# EAGLE board strobe_print (EAGLE 6.3), part 1 of 2
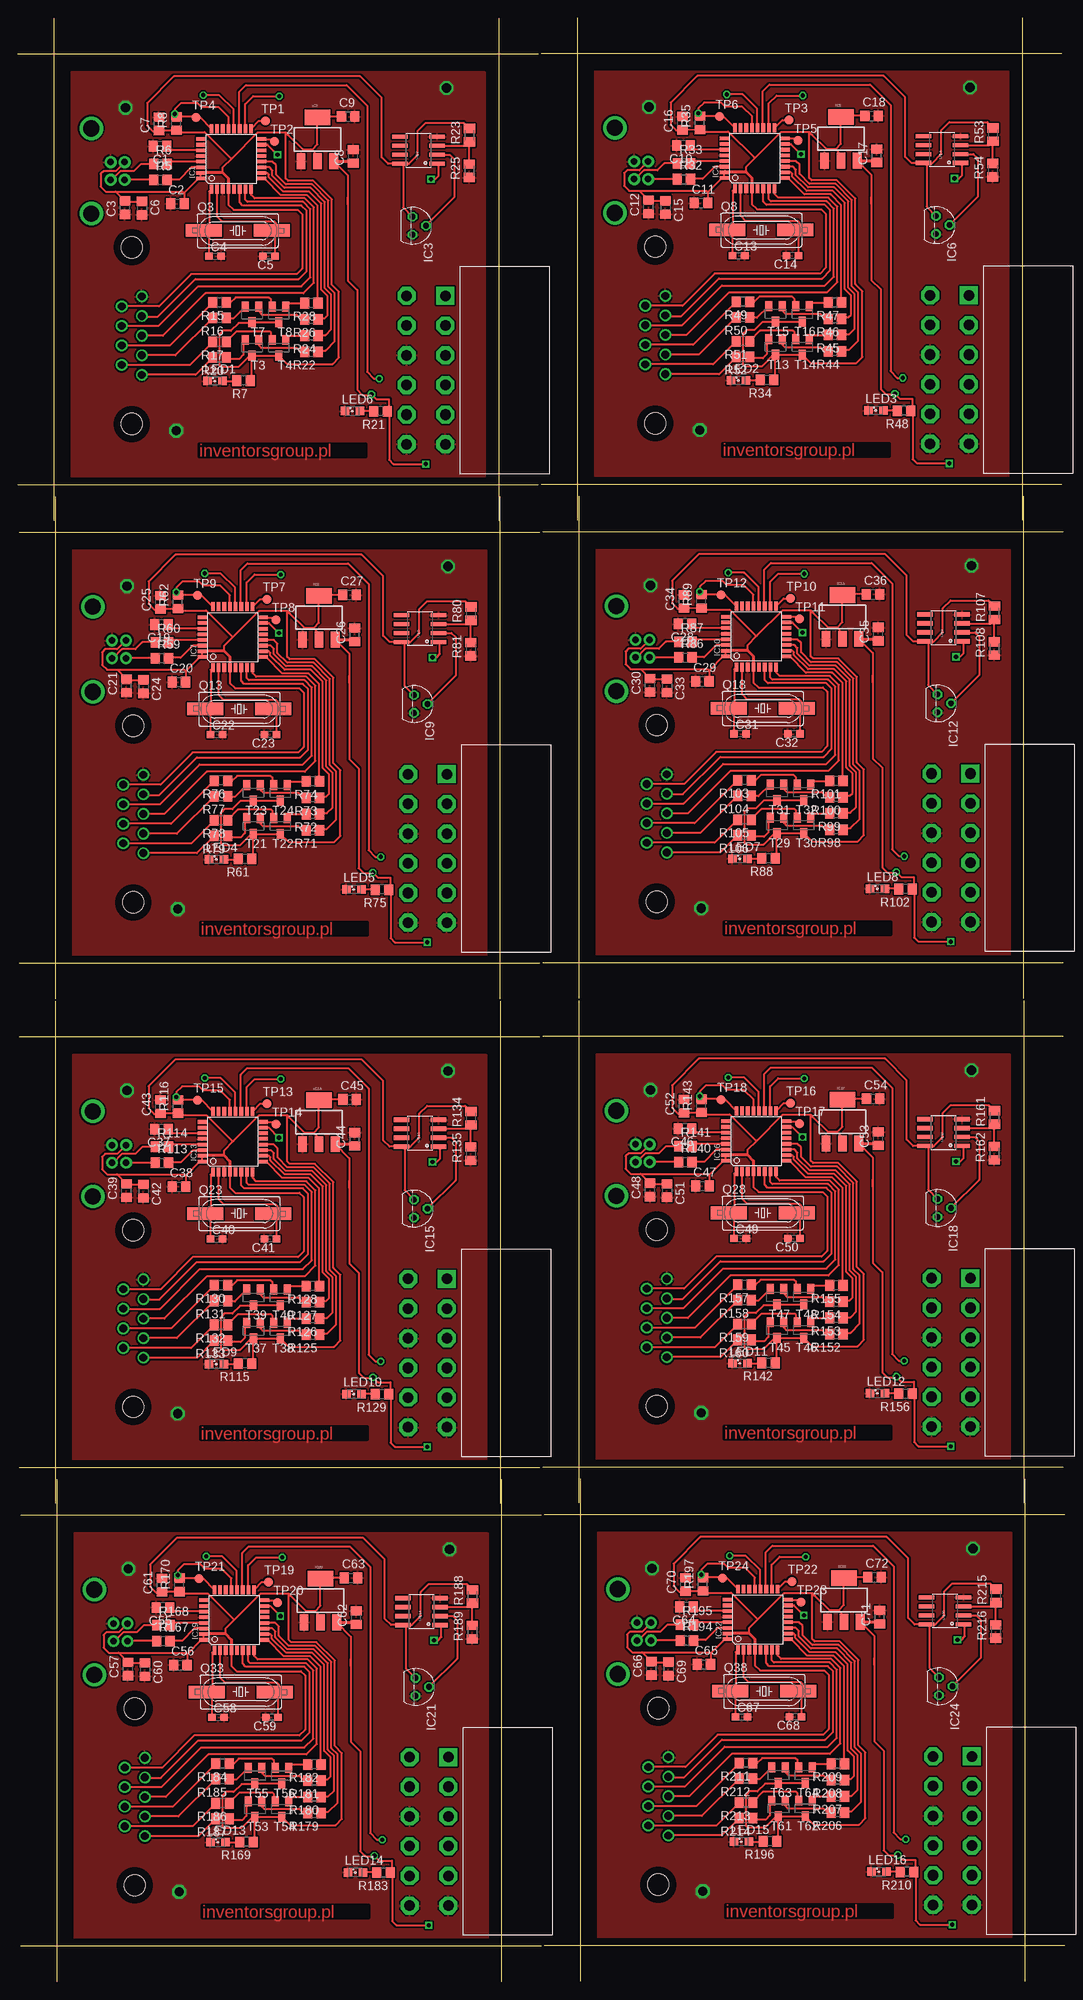
[diagram p0: board, top side]
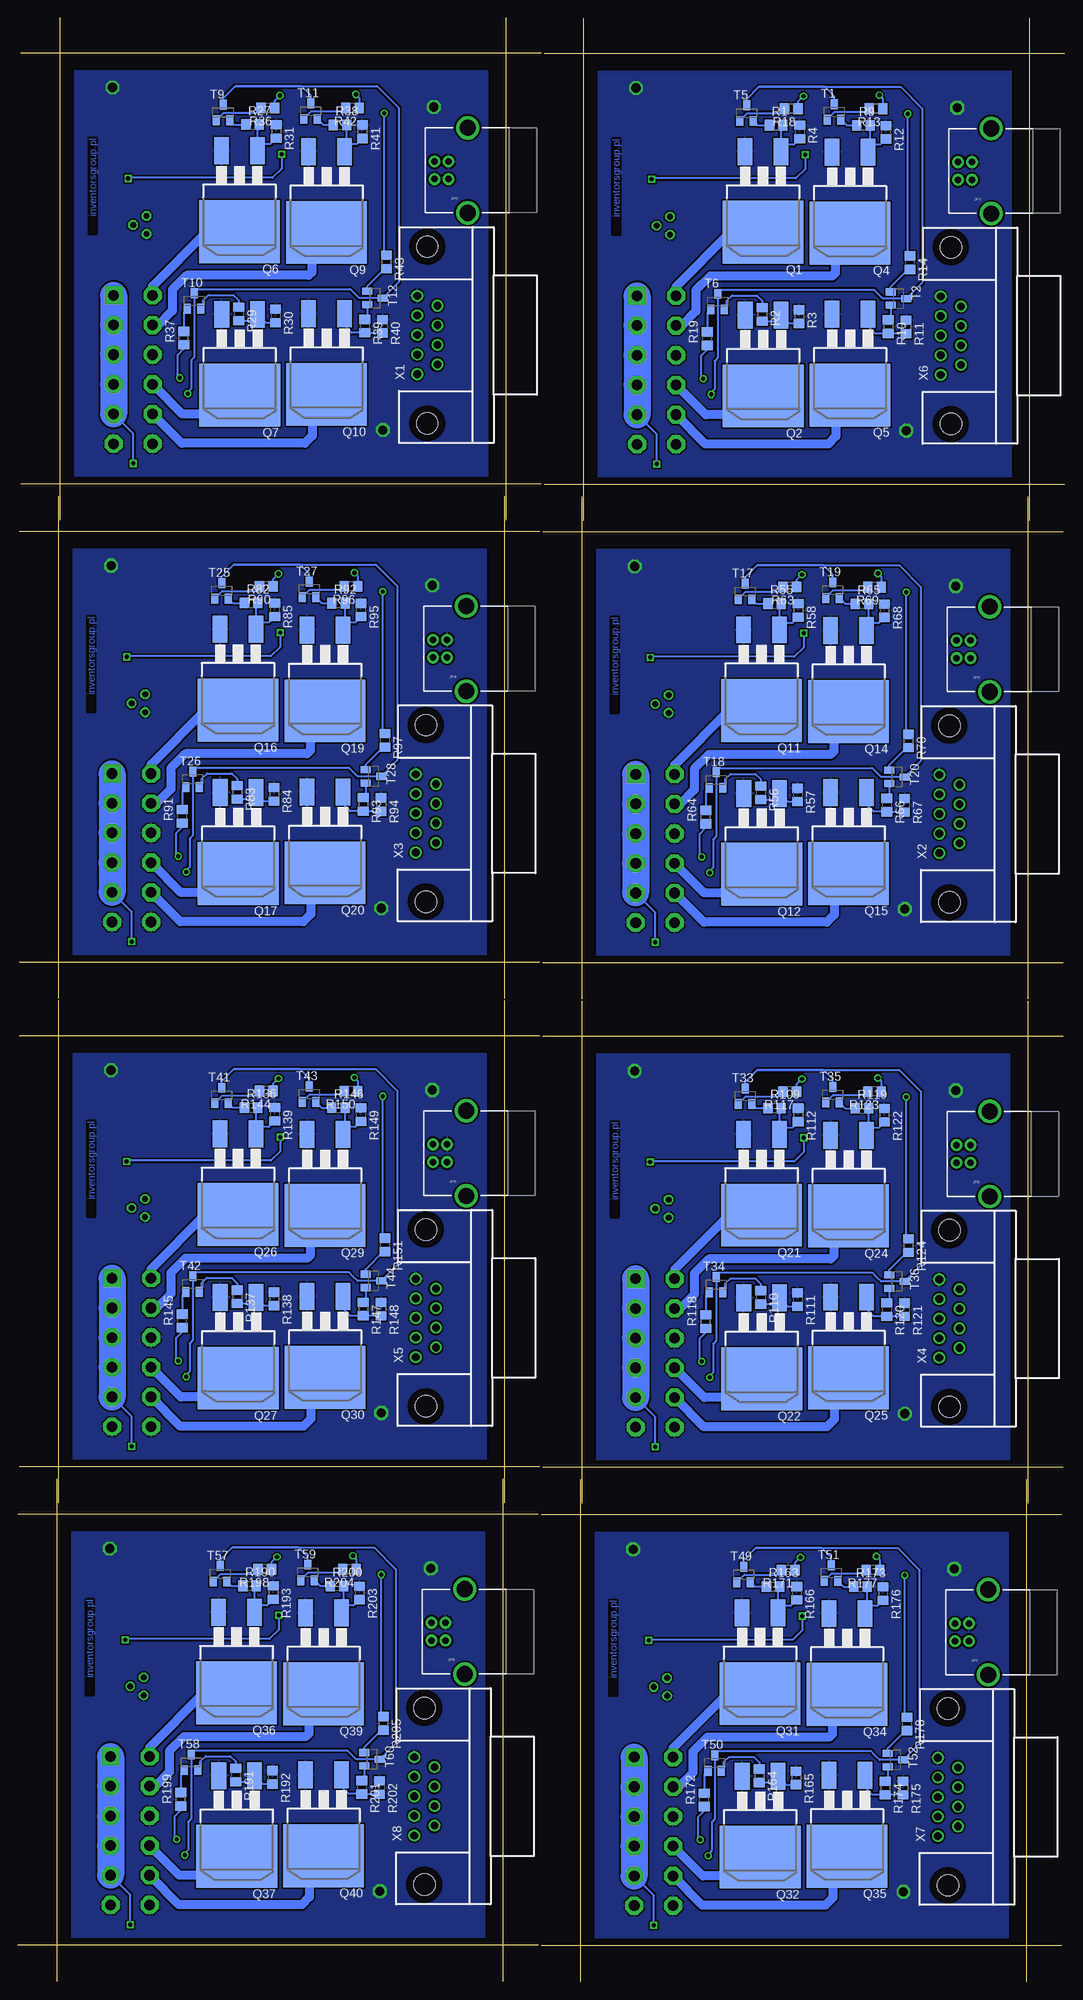
[diagram p1: board, bottom side, seen from below]

Size 148.13 x 277.88 mm. Coordinates in mm from the lower left corner, seen from the top.
Outline: 68.08,206.73 68.08,277.79
Outline: 5.08,277.79 5.08,206.73
Outline: 0,211.81 73.66,211.81
Outline: 0,272.77 73.66,272.77
Outline: 142.13,206.82 142.13,277.88
Outline: 79.13,277.88 79.13,206.82
Outline: 74.05,211.9 147.71,211.9
Outline: 74.05,272.86 147.71,272.86
Outline: 68.29,139.06 68.29,210.12
Outline: 5.29,210.12 5.29,139.06
Outline: 0.21,144.14 73.87,144.14
Outline: 0.21,205.1 73.87,205.1
Outline: 142.34,139.15 142.34,210.21
Outline: 79.34,210.21 79.34,139.15
Outline: 74.26,144.23 147.92,144.23
Outline: 74.26,205.19 147.92,205.19
Outline: 68.29,67.67 68.29,138.73
Outline: 5.29,138.73 5.29,67.67
Outline: 0.21,72.75 73.87,72.75
Outline: 0.21,133.71 73.87,133.71
Outline: 142.34,67.76 142.34,138.82
Outline: 79.34,138.82 79.34,67.76
Outline: 74.26,72.84 147.92,72.84
Outline: 74.26,133.8 147.92,133.8
Outline: 68.5,0 68.5,71.06
Outline: 5.5,71.06 5.5,0
Outline: 0.42,5.08 74.08,5.08
Outline: 0.42,66.04 74.08,66.04
Outline: 142.55,0.09 142.55,71.15
Outline: 79.55,71.15 79.55,0.09
Outline: 74.47,5.17 148.13,5.17
Outline: 74.47,66.13 148.13,66.13
Copper layers (1*16): Top 0.035mm / dielectric 1.5mm / Bottom 0.035mm
Design rules "default": minimum track width 10mil, minimum drill 24mil, track to track 8mil, track to pad 8mil, pad to pad 8mil, via to via 8mil, smd to smd 8mil, copper to edge 40mil, drill to drill 8mil, minimum pad ring 10mil, minimum via ring 8mil, stop-mask expansion 4mil, vias tented up to drill 0mil, thermal gap 10mil

## Footprints (pad centres in the part's own frame; a part is rotated, then mirrored left to right if it is on the bottom)
C0805 = smd 1.3 x 1.5: 1 -0.95,0; 2 0.95,0
C0603 = smd 1.1 x 1: 1 -0.85,0; 2 0.85,0
TQFP32-08 = smd 1.27 x 0.508: 1 -4.293,2.8; 2 -4.293,2; 3 -4.293,1.2; 4 -4.293,0.4; 5 -4.293,-0.4; 6 -4.293,-1.2; 7 -4.293,-2; 8 -4.293,-2.8; 17 4.293,-2.8; 18 4.293,-2; 19 4.293,-1.2; 20 4.293,-0.4; 21 4.293,0.4; 22 4.293,1.2; 23 4.293,2; 24 4.293,2.8 | smd 0.508 x 1.27: 9 -2.8,-4.293; 10 -2,-4.293; 11 -1.2,-4.293; 12 -0.4,-4.293; 13 0.4,-4.293; 14 1.2,-4.293; 15 2,-4.293; 16 2.8,-4.293; 25 2.8,4.293; 26 2,4.293; 27 1.2,4.293; 28 0.4,4.293; 29 -0.4,4.293; 30 -1.2,4.293; 31 -2,4.293; 32 -2.8,4.293
SOT223 = smd 1.219 x 2.235: 1 -2.311,-3.099; 2 0,-3.099; 3 2.311,-3.099 | smd 3.6 x 2.2: 4 0,3.099
TO92 = drill 0.813 octagon: 1 -1.27,0; 2 0,1.905; 3 1.27,0
USB-B-PTH = drill 0.914 pad 1.676: D+ 0,1.25; D- 1.981,1.25; GND 0,-1.25; VBUS 1.981,-1.25 | drill 2.286: S1 -2.718,-6.02; S2 -2.718,6.02
SML0805 = smd 1.2 x 1.2: A 1.05,0; C -1.05,0
D2PACK = smd 2.083 x 3.81: 1 -2.54,-8.89; 3 2.54,-8.89 | smd 11.43 x 8.89: 2 0,2.54
SM49 = smd 5.08 x 1.778: 1 -4.826,0; 2 4.826,0
R0805 = smd 1.3 x 1.5: 1 -0.95,0; 2 0.95,0
M0805 = smd 1.3 x 1.6: 1 -0.95,0; 2 0.95,0
SOT23 = smd 1 x 1.4: 1 -0.95,-1.1; 2 0.95,-1.1; 3 0,1.1
B1,27 = smd 1.27 x 1.27: TP 0,0
MF42-10 = drill 1.5 pad 2.54 square: 1 16.8,0 | drill 1.5 pad 2.54 octagon: 2 12.6,0; 3 8.4,0; 4 4.2,0; 5 0,0; 6 16.8,5.5; 7 12.6,5.5; 8 8.4,5.5; 9 4.2,5.5; 10 0,5.5; 11 -4.2,5.5; 12 -4.2,0
SO08 = smd 0.61 x 2.21: 1 -1.905,-2.616; 2 -0.635,-2.616; 3 0.635,-2.616; 4 1.905,-2.616; 5 1.905,2.616; 6 0.635,2.616; 7 -0.635,2.616; 8 -1.905,2.616
H3M09RA = drill 1.092: 1 -5.537,1.422; 2 -2.769,1.422; 3 0,1.422; 4 2.769,1.422; 5 5.537,1.422; 6 -4.153,-1.422; 7 -1.384,-1.422; 8 1.384,-1.422; 9 4.153,-1.422 | hole 3.048: -12.497,0; 12.497,0

## Placement (x,y rotation side)
C1  1uF  [C0805]  20.12,259.69 180 top
C2  100N  [C0805]  22.59,251.56 0 top
C3  100N  [C0805]  15.18,251 90 top
C4  22Pf  [C0603]  27.92,244.14 0 top
C5  22Pf  [C0603]  35.54,244.14 180 top
C6  100N  [C0805]  17.58,250.92 270 top
C7  100N  [C0805]  19.96,262.86 90 top
C8  100N  [C0805]  47.46,258.25 90 top
C9  100N  [C0805]  46.74,263.89 0 top
C10  1uF  [C0805]  94.17,259.78 180 top
C11  100N  [C0805]  96.64,251.65 0 top
C12  100N  [C0805]  89.23,251.09 90 top
C13  22Pf  [C0603]  101.97,244.23 0 top
C14  22Pf  [C0603]  109.59,244.23 180 top
C15  100N  [C0805]  91.62,251.01 270 top
C16  100N  [C0805]  94.01,262.95 90 top
C17  100N  [C0805]  121.51,258.34 90 top
C18  100N  [C0805]  120.79,263.98 0 top
C19  1uF  [C0805]  20.33,192.02 180 top
C20  100N  [C0805]  22.8,183.89 0 top
C21  100N  [C0805]  15.39,183.33 90 top
C22  22Pf  [C0603]  28.13,176.47 0 top
C23  22Pf  [C0603]  35.75,176.47 180 top
C24  100N  [C0805]  17.78,183.25 270 top
C25  100N  [C0805]  20.17,195.19 90 top
C26  100N  [C0805]  47.67,190.58 90 top
C27  100N  [C0805]  46.95,196.22 0 top
C28  1uF  [C0805]  94.38,192.11 180 top
C29  100N  [C0805]  96.85,183.98 0 top
C30  100N  [C0805]  89.44,183.42 90 top
C31  22Pf  [C0603]  102.18,176.56 0 top
C32  22Pf  [C0603]  109.8,176.56 180 top
C33  100N  [C0805]  91.83,183.34 270 top
C34  100N  [C0805]  94.22,195.28 90 top
C35  100N  [C0805]  121.72,190.67 90 top
C36  100N  [C0805]  121,196.31 0 top
C37  1uF  [C0805]  20.33,120.63 180 top
C38  100N  [C0805]  22.8,112.5 0 top
C39  100N  [C0805]  15.39,111.94 90 top
C40  22Pf  [C0603]  28.14,105.08 0 top
C41  22Pf  [C0603]  35.76,105.08 180 top
C42  100N  [C0805]  17.79,111.86 270 top
C43  100N  [C0805]  20.18,123.8 90 top
C44  100N  [C0805]  47.68,119.19 90 top
C45  100N  [C0805]  46.95,124.83 0 top
C46  1uF  [C0805]  94.38,120.72 180 top
C47  100N  [C0805]  96.85,112.59 0 top
C48  100N  [C0805]  89.44,112.03 90 top
C49  22Pf  [C0603]  102.18,105.17 0 top
C50  22Pf  [C0603]  109.8,105.17 180 top
C51  100N  [C0805]  91.83,111.95 270 top
C52  100N  [C0805]  94.22,123.89 90 top
C53  100N  [C0805]  121.72,119.28 90 top
C54  100N  [C0805]  121,124.92 0 top
C55  1uF  [C0805]  20.54,52.96 180 top
C56  100N  [C0805]  23.01,44.83 0 top
C57  100N  [C0805]  15.6,44.27 90 top
C58  22Pf  [C0603]  28.35,37.41 0 top
C59  22Pf  [C0603]  35.97,37.41 180 top
C60  100N  [C0805]  18,44.19 270 top
C61  100N  [C0805]  20.39,56.13 90 top
C62  100N  [C0805]  47.89,51.52 90 top
C63  100N  [C0805]  47.16,57.16 0 top
C64  1uF  [C0805]  94.59,53.05 180 top
C65  100N  [C0805]  97.06,44.92 0 top
C66  100N  [C0805]  89.65,44.36 90 top
C67  22Pf  [C0603]  102.39,37.5 0 top
C68  22Pf  [C0603]  110.01,37.5 180 top
C69  100N  [C0805]  92.04,44.28 270 top
C70  100N  [C0805]  94.43,56.22 90 top
C71  100N  [C0805]  121.93,51.61 90 top
C72  100N  [C0805]  121.21,57.25 0 top
IC1  AT90USB162A  [TQFP32-08]  30.21,257.91 90 top
IC2  [SOT223]  42.4,260.67 0 top
IC3  LM35CZ  [TO92]  55.84,248.46 270 top
IC4  AT90USB162A  [TQFP32-08]  104.26,258 90 top
IC5  [SOT223]  116.45,260.76 0 top
IC6  LM35CZ  [TO92]  129.89,248.55 270 top
IC7  AT90USB162A  [TQFP32-08]  30.42,190.24 90 top
IC8  [SOT223]  42.61,193 0 top
IC9  LM35CZ  [TO92]  56.05,180.78 270 top
IC10  AT90USB162A  [TQFP32-08]  104.47,190.33 90 top
IC11  [SOT223]  116.66,193.09 0 top
IC12  LM35CZ  [TO92]  130.1,180.87 270 top
IC13  AT90USB162A  [TQFP32-08]  30.42,118.85 90 top
IC14  [SOT223]  42.61,121.61 0 top
IC15  LM35CZ  [TO92]  56.05,109.39 270 top
IC16  AT90USB162A  [TQFP32-08]  104.47,118.94 90 top
IC17  [SOT223]  116.66,121.7 0 top
IC18  LM35CZ  [TO92]  130.1,109.48 270 top
IC19  AT90USB162A  [TQFP32-08]  30.63,51.18 90 top
IC20  [SOT223]  42.82,53.94 0 top
IC21  LM35CZ  [TO92]  56.26,41.72 270 top
IC22  AT90USB162A  [TQFP32-08]  104.68,51.27 90 top
IC23  [SOT223]  116.87,54.03 0 top
IC24  LM35CZ  [TO92]  130.31,41.81 270 top
JP1  USB-B  [USB-B-PTH]  13.14,256.19 180 bottom
JP2  USB-B  [USB-B-PTH]  87.19,256.28 180 bottom
JP3  USB-B  [USB-B-PTH]  13.35,188.52 180 bottom
JP4  USB-B  [USB-B-PTH]  87.4,188.61 180 bottom
JP5  USB-B  [USB-B-PTH]  13.35,117.13 180 bottom
JP6  USB-B  [USB-B-PTH]  87.4,117.22 180 bottom
JP7  USB-B  [USB-B-PTH]  13.56,49.46 180 bottom
JP8  USB-B  [USB-B-PTH]  87.61,49.55 180 bottom
LED1  [SML0805]  27.9,226.48 0 top
LED2  [SML0805]  101.94,226.57 0 top
LED3  [SML0805]  121.39,222.32 0 top
LED4  [SML0805]  28.11,158.81 0 top
LED5  [SML0805]  47.56,154.56 0 top
LED6  [SML0805]  47.35,222.23 0 top
LED7  [SML0805]  102.15,158.9 0 top
LED8  [SML0805]  121.6,154.65 0 top
LED9  [SML0805]  28.11,87.42 0 top
LED10  [SML0805]  47.56,83.17 0 top
LED11  [SML0805]  102.15,87.51 0 top
LED12  [SML0805]  121.6,83.26 0 top
LED13  [SML0805]  28.32,19.75 0 top
LED14  [SML0805]  47.77,15.49 0 top
LED15  [SML0805]  102.36,19.84 0 top
LED16  [SML0805]  121.81,15.58 0 top
Q1  IRF3704S  [D2PACK]  42.71,250.05 180 bottom
Q2  IRF3704S  [D2PACK]  42.69,226.92 180 bottom
Q3  [SM49]  31.13,247.75 0 top
Q4  IRF3704S  [D2PACK]  30.4,249.94 180 bottom
Q5  IRF3704S  [D2PACK]  30.4,227.03 180 bottom
Q6  IRF3704S  [D2PACK]  116.75,250.14 180 bottom
Q7  IRF3704S  [D2PACK]  116.74,227.01 180 bottom
Q8  [SM49]  105.18,247.84 0 top
Q9  IRF3704S  [D2PACK]  104.44,250.03 180 bottom
Q10  IRF3704S  [D2PACK]  104.44,227.12 180 bottom
Q11  IRF3704S  [D2PACK]  42.92,182.38 180 bottom
Q12  IRF3704S  [D2PACK]  42.9,159.25 180 bottom
Q13  [SM49]  31.34,180.08 0 top
Q14  IRF3704S  [D2PACK]  30.61,182.27 180 bottom
Q15  IRF3704S  [D2PACK]  30.6,159.36 180 bottom
Q16  IRF3704S  [D2PACK]  116.96,182.47 180 bottom
Q17  IRF3704S  [D2PACK]  116.95,159.34 180 bottom
Q18  [SM49]  105.39,180.17 0 top
Q19  IRF3704S  [D2PACK]  104.65,182.36 180 bottom
Q20  IRF3704S  [D2PACK]  104.65,159.45 180 bottom
Q21  IRF3704S  [D2PACK]  42.92,110.99 180 bottom
Q22  IRF3704S  [D2PACK]  42.9,87.86 180 bottom
Q23  [SM49]  31.35,108.69 0 top
Q24  IRF3704S  [D2PACK]  30.61,110.88 180 bottom
Q25  IRF3704S  [D2PACK]  30.61,87.97 180 bottom
Q26  IRF3704S  [D2PACK]  116.97,111.08 180 bottom
Q27  IRF3704S  [D2PACK]  116.95,87.95 180 bottom
Q28  [SM49]  105.39,108.78 0 top
Q29  IRF3704S  [D2PACK]  104.65,110.97 180 bottom
Q30  IRF3704S  [D2PACK]  104.65,88.06 180 bottom
Q31  IRF3704S  [D2PACK]  43.13,43.32 180 bottom
Q32  IRF3704S  [D2PACK]  43.11,20.19 180 bottom
Q33  [SM49]  31.56,41.02 0 top
Q34  IRF3704S  [D2PACK]  30.82,43.21 180 bottom
Q35  IRF3704S  [D2PACK]  30.82,20.3 180 bottom
Q36  IRF3704S  [D2PACK]  117.18,43.41 180 bottom
Q37  IRF3704S  [D2PACK]  117.16,20.28 180 bottom
Q38  [SM49]  105.6,41.11 0 top
Q39  IRF3704S  [D2PACK]  104.86,43.3 180 bottom
Q40  IRF3704S  [D2PACK]  104.86,20.39 180 bottom
R1  [R0805]  40.85,262.66 0 bottom
R2  [R0805]  42.82,235.89 270 bottom
R3  [R0805]  37.61,235.58 270 bottom
R4  [R0805]  37.51,261.7 270 bottom
R5  22  [R0805]  20.18,254.94 0 top
R6  22  [R0805]  20.18,257.18 0 top
R7  340  [R0805]  31.96,226.53 180 top
R8  10K  [R0805]  22.44,262.89 90 top
R9  [R0805]  28.51,262.63 0 bottom
R10  [R0805]  24.99,234.16 270 bottom
R11  [R0805]  22.48,234.13 270 bottom
R12  [R0805]  25.31,261.66 270 bottom
R13  [R0805]  26.71,265 180 bottom
R14  [R0805]  21.94,243.22 270 bottom
R15  [R0805]  28.54,237.59 180 top
R16  [R0805]  28.54,235.39 180 top
R17  [R0805]  28.54,231.99 180 top
R18  [R0805]  38.72,265 180 bottom
R19  [R0805]  50.59,232.47 90 bottom
R20  [R0805]  28.54,229.79 180 top
R21  340  [R0805]  51.33,222.18 180 top
R22  [R0805]  41.54,230.59 180 top
R23  [M0805]  63.9,261.25 90 top
R24  [R0805]  41.54,232.89 180 top
R25  [M0805]  63.88,256.22 90 top
R26  [R0805]  41.54,235.19 180 top
R27  [R0805]  114.9,262.75 0 bottom
R28  [R0805]  41.54,237.49 180 top
R29  [R0805]  116.86,235.98 270 bottom
R30  [R0805]  111.66,235.67 270 bottom
R31  [R0805]  111.56,261.79 270 bottom
R32  22  [R0805]  94.23,255.03 0 top
R33  22  [R0805]  94.23,257.27 0 top
R34  340  [R0805]  106,226.62 180 top
R35  10K  [R0805]  96.49,262.98 90 top
R36  [R0805]  112.76,265.09 180 bottom
R37  [R0805]  124.64,232.56 90 bottom
R38  [R0805]  102.55,262.72 0 bottom
R39  [R0805]  99.04,234.25 270 bottom
R40  [R0805]  96.52,234.22 270 bottom
R41  [R0805]  99.36,261.75 270 bottom
R42  [R0805]  100.76,265.08 180 bottom
R43  [R0805]  95.98,243.31 270 bottom
R44  [R0805]  115.59,230.68 180 top
R45  [R0805]  115.59,232.98 180 top
R46  [R0805]  115.59,235.28 180 top
R47  [R0805]  115.59,237.58 180 top
R48  340  [R0805]  125.38,222.27 180 top
R49  [R0805]  102.59,237.68 180 top
R50  [R0805]  102.59,235.48 180 top
R51  [R0805]  102.59,232.08 180 top
R52  [R0805]  102.59,229.88 180 top
R53  [M0805]  137.94,261.34 90 top
R54  [M0805]  137.92,256.31 90 top
R55  [R0805]  41.06,194.99 0 bottom
R56  [R0805]  43.03,168.21 270 bottom
R57  [R0805]  37.82,167.91 270 bottom
R58  [R0805]  37.72,194.03 270 bottom
R59  22  [R0805]  20.39,187.27 0 top
R60  22  [R0805]  20.39,189.51 0 top
R61  340  [R0805]  32.17,158.86 180 top
R62  10K  [R0805]  22.65,195.22 90 top
R63  [R0805]  38.92,197.33 180 bottom
R64  [R0805]  50.8,164.8 90 bottom
R65  [R0805]  28.72,194.96 0 bottom
R66  [R0805]  25.2,166.49 270 bottom
R67  [R0805]  22.69,166.46 270 bottom
R68  [R0805]  25.52,193.99 270 bottom
R69  [R0805]  26.92,197.32 180 bottom
R70  [R0805]  22.15,175.55 270 bottom
R71  [R0805]  41.75,162.92 180 top
R72  [R0805]  41.75,165.22 180 top
R73  [R0805]  41.75,167.52 180 top
R74  [R0805]  41.75,169.82 180 top
R75  340  [R0805]  51.54,154.51 180 top
R76  [R0805]  28.75,169.92 180 top
R77  [R0805]  28.75,167.72 180 top
R78  [R0805]  28.75,164.32 180 top
R79  [R0805]  28.75,162.12 180 top
R80  [M0805]  64.11,193.58 90 top
R81  [M0805]  64.09,188.54 90 top
R82  [R0805]  115.11,195.08 0 bottom
R83  [R0805]  117.07,168.3 270 bottom
R84  [R0805]  111.87,168 270 bottom
R85  [R0805]  111.77,194.12 270 bottom
R86  22  [R0805]  94.44,187.36 0 top
R87  22  [R0805]  94.44,189.6 0 top
R88  340  [R0805]  106.21,158.95 180 top
R89  10K  [R0805]  96.7,195.31 90 top
R90  [R0805]  112.97,197.42 180 bottom
R91  [R0805]  124.85,164.89 90 bottom
R92  [R0805]  102.76,195.05 0 bottom
R93  [R0805]  99.25,166.58 270 bottom
R94  [R0805]  96.73,166.55 270 bottom
R95  [R0805]  99.57,194.08 270 bottom
R96  [R0805]  100.97,197.41 180 bottom
R97  [R0805]  96.19,175.64 270 bottom
R98  [R0805]  115.8,163.01 180 top
R99  [R0805]  115.8,165.31 180 top
R100  [R0805]  115.8,167.61 180 top
R101  [R0805]  115.8,169.91 180 top
R102  340  [R0805]  125.59,154.6 180 top
R103  [R0805]  102.8,170.01 180 top
R104  [R0805]  102.8,167.81 180 top
R105  [R0805]  102.8,164.41 180 top
R106  [R0805]  102.8,162.21 180 top
R107  [M0805]  138.15,193.67 90 top
R108  [M0805]  138.13,188.63 90 top
R109  [R0805]  41.06,123.6 0 bottom
R110  [R0805]  43.03,96.83 270 bottom
R111  [R0805]  37.82,96.52 270 bottom
R112  [R0805]  37.72,122.64 270 bottom
R113  22  [R0805]  20.39,115.88 0 top
R114  22  [R0805]  20.39,118.12 0 top
R115  340  [R0805]  32.17,87.47 180 top
R116  10K  [R0805]  22.65,123.83 90 top
R117  [R0805]  38.93,125.94 180 bottom
R118  [R0805]  50.8,93.41 90 bottom
R119  [R0805]  28.72,123.57 0 bottom
R120  [R0805]  25.2,95.1 270 bottom
R121  [R0805]  22.69,95.07 270 bottom
R122  [R0805]  25.52,122.6 270 bottom
R123  [R0805]  26.92,125.93 180 bottom
R124  [R0805]  22.15,104.16 270 bottom
R125  [R0805]  41.75,91.53 180 top
R126  [R0805]  41.75,93.83 180 top
R127  [R0805]  41.75,96.13 180 top
R128  [R0805]  41.75,98.43 180 top
R129  340  [R0805]  51.54,83.12 180 top
R130  [R0805]  28.75,98.53 180 top
R131  [R0805]  28.75,96.33 180 top
R132  [R0805]  28.75,92.93 180 top
R133  [R0805]  28.75,90.73 180 top
R134  [M0805]  64.11,122.19 90 top
R135  [M0805]  64.09,117.15 90 top
R136  [R0805]  115.11,123.69 0 bottom
R137  [R0805]  117.07,96.92 270 bottom
R138  [R0805]  111.87,96.61 270 bottom
R139  [R0805]  111.77,122.73 270 bottom
R140  22  [R0805]  94.44,115.97 0 top
R141  22  [R0805]  94.44,118.21 0 top
R142  340  [R0805]  106.21,87.56 180 top
R143  10K  [R0805]  96.7,123.92 90 top
R144  [R0805]  112.97,126.03 180 bottom
R145  [R0805]  124.85,93.5 90 bottom
R146  [R0805]  102.76,123.66 0 bottom
R147  [R0805]  99.25,95.19 270 bottom
R148  [R0805]  96.73,95.16 270 bottom
R149  [R0805]  99.57,122.69 270 bottom
R150  [R0805]  100.97,126.02 180 bottom
R151  [R0805]  96.19,104.25 270 bottom
R152  [R0805]  115.8,91.62 180 top
R153  [R0805]  115.8,93.92 180 top
R154  [R0805]  115.8,96.22 180 top
R155  [R0805]  115.8,98.52 180 top
R156  340  [R0805]  125.59,83.21 180 top
R157  [R0805]  102.8,98.62 180 top
R158  [R0805]  102.8,96.42 180 top
R159  [R0805]  102.8,93.02 180 top
R160  [R0805]  102.8,90.82 180 top
R161  [M0805]  138.15,122.28 90 top
R162  [M0805]  138.14,117.24 90 top
R163  [R0805]  41.27,55.93 0 bottom
R164  [R0805]  43.24,29.15 270 bottom
R165  [R0805]  38.03,28.85 270 bottom
R166  [R0805]  37.93,54.97 270 bottom
R167  22  [R0805]  20.6,48.21 0 top
R168  22  [R0805]  20.6,50.45 0 top
R169  340  [R0805]  32.38,19.8 180 top
R170  10K  [R0805]  22.86,56.16 90 top
R171  [R0805]  39.14,58.27 180 bottom
R172  [R0805]  51.01,25.74 90 bottom
R173  [R0805]  28.93,55.9 0 bottom
R174  [R0805]  25.41,27.43 270 bottom
R175  [R0805]  22.9,27.4 270 bottom
R176  [R0805]  25.73,54.93 270 bottom
R177  [R0805]  27.13,58.26 180 bottom
R178  [R0805]  22.36,36.49 270 bottom
R179  [R0805]  41.96,23.86 180 top
R180  [R0805]  41.96,26.16 180 top
R181  [R0805]  41.96,28.46 180 top
R182  [R0805]  41.96,30.76 180 top
R183  340  [R0805]  51.75,15.45 180 top
R184  [R0805]  28.96,30.86 180 top
R185  [R0805]  28.96,28.66 180 top
R186  [R0805]  28.96,25.26 180 top
R187  [R0805]  28.96,23.06 180 top
R188  [M0805]  64.32,54.52 90 top
R189  [M0805]  64.3,49.48 90 top
R190  [R0805]  115.32,56.02 0 bottom
R191  [R0805]  117.28,29.24 270 bottom
R192  [R0805]  112.08,28.94 270 bottom
R193  [R0805]  111.98,55.06 270 bottom
R194  22  [R0805]  94.65,48.3 0 top
R195  22  [R0805]  94.65,50.54 0 top
R196  340  [R0805]  106.42,19.89 180 top
R197  10K  [R0805]  96.91,56.25 90 top
R198  [R0805]  113.18,58.36 180 bottom
R199  [R0805]  125.06,25.82 90 bottom
R200  [R0805]  102.97,55.99 0 bottom
R201  [R0805]  99.46,27.52 270 bottom
R202  [R0805]  96.94,27.49 270 bottom
R203  [R0805]  99.78,55.02 270 bottom
R204  [R0805]  101.18,58.35 180 bottom
R205  [R0805]  96.4,36.58 270 bottom
R206  [R0805]  116.01,23.95 180 top
R207  [R0805]  116.01,26.25 180 top
R208  [R0805]  116.01,28.55 180 top
R209  [R0805]  116.01,30.85 180 top
R210  340  [R0805]  125.8,15.54 180 top
R211  [R0805]  103.01,30.95 180 top
R212  [R0805]  103.01,28.75 180 top
R213  [R0805]  103.01,25.35 180 top
R214  [R0805]  103.01,23.15 180 top
R215  [M0805]  138.36,54.61 90 top
R216  [M0805]  138.35,49.57 90 top
T1  BC849  [SOT23]  32.65,264.56 0 bottom
T2  BC849  [SOT23]  23.54,238.13 270 bottom
T3  BC849  [SOT23]  33.14,231.19 180 top
T4  BC849  [SOT23]  36.94,231.19 180 top
T5  BC849  [SOT23]  45.03,264.37 0 bottom
T6  BC849  [SOT23]  49.12,237.7 0 bottom
T7  BC849  [SOT23]  33.14,235.89 180 top
T8  BC849  [SOT23]  36.94,235.89 180 top
T9  BC849  [SOT23]  119.08,264.46 0 bottom
T10  BC849  [SOT23]  123.17,237.79 0 bottom
T11  BC849  [SOT23]  106.7,264.65 0 bottom
T12  BC849  [SOT23]  97.59,238.22 270 bottom
T13  BC849  [SOT23]  107.19,231.28 180 top
T14  BC849  [SOT23]  110.99,231.28 180 top
T15  BC849  [SOT23]  107.19,235.98 180 top
T16  BC849  [SOT23]  110.99,235.98 180 top
T17  BC849  [SOT23]  45.24,196.7 0 bottom
T18  BC849  [SOT23]  49.33,170.03 0 bottom
T19  BC849  [SOT23]  32.86,196.89 0 bottom
T20  BC849  [SOT23]  23.75,170.46 270 bottom
T21  BC849  [SOT23]  33.35,163.52 180 top
T22  BC849  [SOT23]  37.15,163.52 180 top
T23  BC849  [SOT23]  33.35,168.22 180 top
T24  BC849  [SOT23]  37.15,168.22 180 top
T25  BC849  [SOT23]  119.29,196.79 0 bottom
T26  BC849  [SOT23]  123.38,170.12 0 bottom
T27  BC849  [SOT23]  106.91,196.98 0 bottom
T28  BC849  [SOT23]  97.8,170.55 270 bottom
T29  BC849  [SOT23]  107.4,163.61 180 top
T30  BC849  [SOT23]  111.2,163.61 180 top
T31  BC849  [SOT23]  107.4,168.31 180 top
T32  BC849  [SOT23]  111.2,168.31 180 top
T33  BC849  [SOT23]  45.24,125.31 0 bottom
T34  BC849  [SOT23]  49.33,98.64 0 bottom
T35  BC849  [SOT23]  32.86,125.5 0 bottom
T36  BC849  [SOT23]  23.75,99.07 270 bottom
T37  BC849  [SOT23]  33.35,92.13 180 top
T38  BC849  [SOT23]  37.15,92.13 180 top
T39  BC849  [SOT23]  33.35,96.83 180 top
T40  BC849  [SOT23]  37.15,96.83 180 top
T41  BC849  [SOT23]  119.29,125.4 0 bottom
T42  BC849  [SOT23]  123.38,98.73 0 bottom
T43  BC849  [SOT23]  106.91,125.59 0 bottom
T44  BC849  [SOT23]  97.8,99.16 270 bottom
T45  BC849  [SOT23]  107.4,92.22 180 top
T46  BC849  [SOT23]  111.2,92.22 180 top
T47  BC849  [SOT23]  107.4,96.92 180 top
T48  BC849  [SOT23]  111.2,96.92 180 top
T49  BC849  [SOT23]  45.45,57.63 0 bottom
T50  BC849  [SOT23]  49.54,30.97 0 bottom
T51  BC849  [SOT23]  33.07,57.83 0 bottom
T52  BC849  [SOT23]  23.96,31.4 270 bottom
T53  BC849  [SOT23]  33.56,24.46 180 top
T54  BC849  [SOT23]  37.36,24.46 180 top
T55  BC849  [SOT23]  33.56,29.16 180 top
T56  BC849  [SOT23]  37.36,29.16 180 top
T57  BC849  [SOT23]  119.5,57.72 0 bottom
T58  BC849  [SOT23]  123.59,31.06 0 bottom
T59  BC849  [SOT23]  107.12,57.92 0 bottom
T60  BC849  [SOT23]  98.01,31.49 270 bottom
T61  BC849  [SOT23]  107.61,24.55 180 top
T62  BC849  [SOT23]  111.41,24.55 180 top
T63  BC849  [SOT23]  107.61,29.25 180 top
T64  BC849  [SOT23]  111.41,29.25 180 top
TP1  TPB1,27  [B1,27]  35.04,263.29 0 top
TP2  TPB1,27  [B1,27]  36.34,260.39 0 top
TP3  TPB1,27  [B1,27]  109.09,263.38 0 top
TP4  TPB1,27  [B1,27]  25.24,263.79 0 top
TP5  TPB1,27  [B1,27]  110.39,260.48 0 top
TP6  TPB1,27  [B1,27]  99.29,263.88 0 top
TP7  TPB1,27  [B1,27]  35.25,195.62 0 top
TP8  TPB1,27  [B1,27]  36.55,192.72 0 top
TP9  TPB1,27  [B1,27]  25.45,196.12 0 top
TP10  TPB1,27  [B1,27]  109.3,195.71 0 top
TP11  TPB1,27  [B1,27]  110.6,192.81 0 top
TP12  TPB1,27  [B1,27]  99.5,196.21 0 top
TP13  TPB1,27  [B1,27]  35.25,124.23 0 top
TP14  TPB1,27  [B1,27]  36.55,121.33 0 top
TP15  TPB1,27  [B1,27]  25.45,124.73 0 top
TP16  TPB1,27  [B1,27]  109.3,124.32 0 top
TP17  TPB1,27  [B1,27]  110.6,121.42 0 top
TP18  TPB1,27  [B1,27]  99.5,124.82 0 top
TP19  TPB1,27  [B1,27]  35.46,56.56 0 top
TP20  TPB1,27  [B1,27]  36.76,53.66 0 top
TP21  TPB1,27  [B1,27]  25.66,57.06 0 top
TP22  TPB1,27  [B1,27]  109.51,56.65 0 top
TP23  TPB1,27  [B1,27]  110.81,53.75 0 top
TP24  TPB1,27  [B1,27]  99.71,57.15 0 top
U$1  MF42-10  [MF42-10]  60.5,221.72 90 top
U$2  LM393  [SO08]  56.71,259.12 90 top
U$3  MF42-10  [MF42-10]  134.55,221.81 90 top
U$4  LM393  [SO08]  130.76,259.21 90 top
U$5  MF42-10  [MF42-10]  60.71,154.05 90 top
U$6  LM393  [SO08]  56.92,191.45 90 top
U$7  MF42-10  [MF42-10]  134.76,154.14 90 top
U$8  LM393  [SO08]  130.97,191.54 90 top
U$9  MF42-10  [MF42-10]  60.71,82.66 90 top
U$10  LM393  [SO08]  56.92,120.06 90 top
U$11  MF42-10  [MF42-10]  134.76,82.75 90 top
U$12  LM393  [SO08]  130.97,120.15 90 top
U$13  MF42-10  [MF42-10]  60.92,14.99 90 top
U$14  LM393  [SO08]  57.13,52.39 90 top
U$15  MF42-10  [MF42-10]  134.97,15.08 90 top
U$16  LM393  [SO08]  131.18,52.48 90 top
X1  D-SUB9-H3M09RA  [H3M09RA]  90.19,232.98 90 bottom
X2  D-SUB9-H3M09RA  [H3M09RA]  16.35,165.22 90 bottom
X3  D-SUB9-H3M09RA  [H3M09RA]  90.4,165.31 90 bottom
X4  D-SUB9-H3M09RA  [H3M09RA]  16.35,93.83 90 bottom
X5  D-SUB9-H3M09RA  [H3M09RA]  90.4,93.92 90 bottom
X6  D-SUB9-H3M09RA  [H3M09RA]  16.14,232.89 90 bottom
X7  D-SUB9-H3M09RA  [H3M09RA]  16.56,26.16 90 bottom
X8  D-SUB9-H3M09RA  [H3M09RA]  90.61,26.25 90 bottom

## Library data of the parts
C1-C72 R1-R216 = rcl
IC1 IC4 IC7 IC10 IC13 IC16 IC19 IC22 = adafruit
IC2 IC5 IC8 IC11 IC14 IC17 IC20 IC23 = SparkFun-PowerIC
IC3 IC6 IC9 IC12 IC15 IC18 IC21 IC24 = lm35
JP1-JP8 = SparkFun-Connectors; PROD_ID: CONN-08278
LED1-LED16 = led
Q1 Q2 Q4-Q7 Q9-Q12 Q14-Q17 Q19-Q22 Q24-Q27 Q29-Q32 Q34-Q37 Q39 Q40 = transistor-power
Q3 Q8 Q13 Q18 Q23 Q28 Q33 Q38 = crystal; OC_FARNELL: unknown; OC_NEWARK: unknown
T1-T64 = transistor
TP1-TP24 = testpad
U$1 U$3 U$5 U$7 U$9 U$11 U$13 U$15 = con-amphenol
U$2 U$4 U$6 U$8 U$10 U$12 U$14 U$16 = SparkFun-AnalogIC
X1-X8 = con-thomas-betts; OC_FARNELL: unknown; OC_NEWARK: unknown

## Nets
5V: C2.2 C3.2 C6.1 C7.1 C9.1 IC1.4 IC1.31 IC1.32 IC2.2 IC2.4 IC3.1 JP1.VBUS R7.1 R8.1 R23.2 T3.3 T4.3 T7.3 T8.3 U$2.8 X6.9
5V1: C11.2 C12.2 C15.1 C16.1 C18.1 IC4.4 IC4.31 IC4.32 IC5.2 IC5.4 IC6.1 JP2.VBUS R34.1 R35.1 R53.2 T13.3 T14.3 T15.3 T16.3 U$4.8 X1.9
5V2: C20.2 C21.2 C24.1 C25.1 C27.1 IC7.4 IC7.31 IC7.32 IC8.2 IC8.4 IC9.1 JP3.VBUS R61.1 R62.1 R80.2 T21.3 T22.3 T23.3 T24.3 U$6.8 X2.9
5V3: C29.2 C30.2 C33.1 C34.1 C36.1 IC10.4 IC10.31 IC10.32 IC11.2 IC11.4 IC12.1 JP4.VBUS R88.1 R89.1 R107.2 T29.3 T30.3 T31.3 T32.3 U$8.8 X3.9
5V4: C38.2 C39.2 C42.1 C43.1 C45.1 IC13.4 IC13.31 IC13.32 IC14.2 IC14.4 IC15.1 JP5.VBUS R115.1 R116.1 R134.2 T37.3 T38.3 T39.3 T40.3 U$10.8 X4.9
5V5: C47.2 C48.2 C51.1 C52.1 C54.1 IC16.4 IC16.31 IC16.32 IC17.2 IC17.4 IC18.1 JP6.VBUS R142.1 R143.1 R161.2 T45.3 T46.3 T47.3 T48.3 U$12.8 X5.9
5V6: C56.2 C57.2 C60.1 C61.1 C63.1 IC19.4 IC19.31 IC19.32 IC20.2 IC20.4 IC21.1 JP7.VBUS R169.1 R170.1 R188.2 T53.3 T54.3 T55.3 T56.3 U$14.8 X7.9
5V7: C65.2 C66.2 C69.1 C70.1 C72.1 IC22.4 IC22.31 IC22.32 IC23.2 IC23.4 IC24.1 JP8.VBUS R196.1 R197.1 R215.2 T61.3 T62.3 T63.3 T64.3 U$16.8 X8.9
12V: C8.1 IC2.3 R21.1 T1.3 T2.3 T5.3 T6.3 U$1.1 U$1.2 U$1.3 U$1.4 U$1.5
12V1: C17.1 IC5.3 R48.1 T9.3 T10.3 T11.3 T12.3 U$3.1 U$3.2 U$3.3 U$3.4 U$3.5
12V2: C26.1 IC8.3 R75.1 T17.3 T18.3 T19.3 T20.3 U$5.1 U$5.2 U$5.3 U$5.4 U$5.5
12V3: C35.1 IC11.3 R102.1 T25.3 T26.3 T27.3 T28.3 U$7.1 U$7.2 U$7.3 U$7.4 U$7.5
12V4: C44.1 IC14.3 R129.1 T33.3 T34.3 T35.3 T36.3 U$9.1 U$9.2 U$9.3 U$9.4 U$9.5
12V5: C53.1 IC17.3 R156.1 T41.3 T42.3 T43.3 T44.3 U$11.1 U$11.2 U$11.3 U$11.4 U$11.5
12V6: C62.1 IC20.3 R183.1 T49.3 T50.3 T51.3 T52.3 U$13.1 U$13.2 U$13.3 U$13.4 U$13.5
12V7: C71.1 IC23.3 R210.1 T57.3 T58.3 T59.3 T60.3 U$15.1 U$15.2 U$15.3 U$15.4 U$15.5
B1: IC1.6 X6.4
B2: IC1.7 X6.8
B3: IC1.8 X6.3
B4: IC4.6 X1.4
B5: IC4.7 X1.8
B6: IC4.8 X1.3
B7: IC7.6 X2.4
B8: IC7.7 X2.8
B9: IC7.8 X2.3
B10: IC10.6 X3.4
B11: IC10.7 X3.8
B12: IC10.8 X3.3
B13: IC13.6 X4.4
B14: IC13.7 X4.8
B15: IC13.8 X4.3
B16: IC16.6 X5.4
B17: IC16.7 X5.8
B18: IC16.8 X5.3
B19: IC19.6 X7.4
B20: IC19.7 X7.8
B21: IC19.8 X7.3
B22: IC22.6 X8.4
B23: IC22.7 X8.8
B24: IC22.8 X8.3
CH1: IC1.18 R18.1
CH2: IC1.19 R19.1
CH3: IC1.20 R13.1
CH4: IC1.21 R14.1
CH5: IC4.18 R36.1
CH6: IC4.19 R37.1
CH7: IC4.20 R42.1
CH8: IC4.21 R43.1
CH9: IC7.18 R63.1
CH10: IC7.19 R64.1
CH11: IC7.20 R69.1
CH12: IC7.21 R70.1
CH13: IC10.18 R90.1
CH14: IC10.19 R91.1
CH15: IC10.20 R96.1
CH16: IC10.21 R97.1
CH17: IC13.18 R117.1
CH18: IC13.19 R118.1
CH19: IC13.20 R123.1
CH20: IC13.21 R124.1
CH21: IC16.18 R144.1
CH22: IC16.19 R145.1
CH23: IC16.20 R150.1
CH24: IC16.21 R151.1
CH25: IC19.18 R171.1
CH26: IC19.19 R172.1
CH27: IC19.20 R177.1
CH28: IC19.21 R178.1
CH29: IC22.18 R198.1
CH30: IC22.19 R199.1
CH31: IC22.20 R204.1
CH32: IC22.21 R205.1
GND: C1.2 C2.1 C3.1 C4.2 C5.2 C6.2 C7.2 C8.2 C9.2 IC1.3 IC1.28 IC2.1 IC3.3 JP1.GND LED1.C LED6.C Q1.3 Q2.3 Q4.3 Q5.3 R3.1 R4.1 R11.1 R12.1 R25.1 U$1.8 U$1.11 U$1.12 U$2.4 X6.5
GND1: C10.2 C11.1 C12.1 C13.2 C14.2 C15.2 C16.2 C17.2 C18.2 IC4.3 IC4.28 IC5.1 IC6.3 JP2.GND LED2.C LED3.C Q6.3 Q7.3 Q9.3 Q10.3 R30.1 R31.1 R40.1 R41.1 R54.1 U$3.8 U$3.11 U$3.12 U$4.4 X1.5
GND2: C19.2 C20.1 C21.1 C22.2 C23.2 C24.2 C25.2 C26.2 C27.2 IC7.3 IC7.28 IC8.1 IC9.3 JP3.GND LED4.C LED5.C Q11.3 Q12.3 Q14.3 Q15.3 R57.1 R58.1 R67.1 R68.1 R81.1 U$5.8 U$5.11 U$5.12 U$6.4 X2.5
GND3: C28.2 C29.1 C30.1 C31.2 C32.2 C33.2 C34.2 C35.2 C36.2 IC10.3 IC10.28 IC11.1 IC12.3 JP4.GND LED7.C LED8.C Q16.3 Q17.3 Q19.3 Q20.3 R84.1 R85.1 R94.1 R95.1 R108.1 U$7.8 U$7.11 U$7.12 U$8.4 X3.5
GND4: C37.2 C38.1 C39.1 C40.2 C41.2 C42.2 C43.2 C44.2 C45.2 IC13.3 IC13.28 IC14.1 IC15.3 JP5.GND LED9.C LED10.C Q21.3 Q22.3 Q24.3 Q25.3 R111.1 R112.1 R121.1 R122.1 R135.1 U$9.8 U$9.11 U$9.12 U$10.4 X4.5
GND5: C46.2 C47.1 C48.1 C49.2 C50.2 C51.2 C52.2 C53.2 C54.2 IC16.3 IC16.28 IC17.1 IC18.3 JP6.GND LED11.C LED12.C Q26.3 Q27.3 Q29.3 Q30.3 R138.1 R139.1 R148.1 R149.1 R162.1 U$11.8 U$11.11 U$11.12 U$12.4 X5.5
GND6: C55.2 C56.1 C57.1 C58.2 C59.2 C60.2 C61.2 C62.2 C63.2 IC19.3 IC19.28 IC20.1 IC21.3 JP7.GND LED13.C LED14.C Q31.3 Q32.3 Q34.3 Q35.3 R165.1 R166.1 R175.1 R176.1 R189.1 U$13.8 U$13.11 U$13.12 U$14.4 X7.5
GND7: C64.2 C65.1 C66.1 C67.2 C68.2 C69.2 C70.2 C71.2 C72.2 IC22.3 IC22.28 IC23.1 IC24.3 JP8.GND LED15.C LED16.C Q36.3 Q37.3 Q39.3 Q40.3 R192.1 R193.1 R202.1 R203.1 R216.1 U$15.8 U$15.11 U$15.12 U$16.4 X8.5
L1: Q1.2 U$1.6
L2: Q2.2 U$1.9
L3: Q4.2 U$1.7
L4: Q5.2 U$1.10
L5: Q6.2 U$3.6
L6: Q7.2 U$3.9
L7: Q9.2 U$3.7
L8: Q10.2 U$3.10
L9: Q11.2 U$5.6
L10: Q12.2 U$5.9
L11: Q14.2 U$5.7
L12: Q15.2 U$5.10
L13: Q16.2 U$7.6
L14: Q17.2 U$7.9
L15: Q19.2 U$7.7
L16: Q20.2 U$7.10
L17: Q21.2 U$9.6
L18: Q22.2 U$9.9
L19: Q24.2 U$9.7
L20: Q25.2 U$9.10
L21: Q26.2 U$11.6
L22: Q27.2 U$11.9
L23: Q29.2 U$11.7
L24: Q30.2 U$11.10
L25: Q31.2 U$13.6
L26: Q32.2 U$13.9
L27: Q34.2 U$13.7
L28: Q35.2 U$13.10
L29: Q36.2 U$15.6
L30: Q37.2 U$15.9
L31: Q39.2 U$15.7
L32: Q40.2 U$15.10
N$1: Q1.1 R1.2 R4.2
N$2: Q2.1 R2.2 R3.2
N$3: IC3.2 U$2.2
N$4: R23.1 R25.2 U$2.3
N$5: C1.1 IC1.27
N$6: JP1.D+ R6.1
N$7: JP1.D- R5.1
N$8: IC1.30 R5.2
N$9: IC1.29 R6.2
N$10: LED1.A R7.2
N$11: Q4.1 R9.2 R12.2
N$12: C5.1 IC1.2 Q3.2
N$13: C4.1 IC1.1 Q3.1
N$14: IC1.24 R8.2 TP4.TP
N$15: Q5.1 R10.2 R11.2
N$16: Q6.1 R27.2 R31.2
N$17: Q7.1 R29.2 R30.2
N$18: R9.1 T1.2
N$19: R10.1 T2.2
N$20: R13.2 T1.1
N$21: R14.2 T2.1
N$22: IC1.17 TP1.TP
N$23: LED6.A R21.2
N$24: R22.2 T3.1
N$25: IC1.16 TP2.TP
N$26: R20.2 X6.1
N$27: R24.2 T4.1
N$28: R1.1 T5.2
N$29: R2.1 T6.2
N$30: R18.2 T5.1
N$31: R19.2 T6.1
N$32: C10.1 IC4.27
N$33: R17.2 X6.6
N$34: R26.2 T7.1
N$35: R16.2 X6.2
N$36: R15.2 X6.7
N$37: R28.2 T8.1
N$38: JP2.D+ R33.1
N$39: JP2.D- R32.1
N$40: IC4.30 R32.2
N$41: IC4.29 R33.2
N$42: LED2.A R34.2
N$43: C14.1 IC4.2 Q8.2
N$44: C13.1 IC4.1 Q8.1
N$45: IC4.24 R35.2 TP6.TP
N$46: R27.1 T9.2
N$47: R29.1 T10.2
N$48: R36.2 T9.1
N$49: R37.2 T10.1
N$50: Q9.1 R38.2 R41.2
N$51: Q10.1 R39.2 R40.2
N$52: R38.1 T11.2
N$53: R39.1 T12.2
N$54: R42.2 T11.1
N$55: R43.2 T12.1
N$56: R44.2 T13.1
N$57: R45.2 T14.1
N$58: R46.2 T15.1
N$59: R47.2 T16.1
N$60: IC4.17 TP3.TP
N$61: IC4.16 TP5.TP
N$62: LED3.A R48.2
N$63: R52.2 X1.1
N$64: R51.2 X1.6
N$65: R50.2 X1.2
N$66: R49.2 X1.7
N$67: IC6.2 U$4.2
N$68: R53.1 R54.2 U$4.3
N$69: Q11.1 R55.2 R58.2
N$70: Q12.1 R56.2 R57.2
N$71: C19.1 IC7.27
N$72: JP3.D+ R60.1
N$73: JP3.D- R59.1
N$74: IC7.30 R59.2
N$75: IC7.29 R60.2
N$76: LED4.A R61.2
N$77: C23.1 IC7.2 Q13.2
N$78: C22.1 IC7.1 Q13.1
N$79: IC7.24 R62.2 TP9.TP
N$80: R55.1 T17.2
N$81: R56.1 T18.2
N$82: R63.2 T17.1
N$83: R64.2 T18.1
N$84: Q14.1 R65.2 R68.2
N$85: Q15.1 R66.2 R67.2
N$86: R65.1 T19.2
N$87: R66.1 T20.2
N$88: R69.2 T19.1
N$89: R70.2 T20.1
N$90: R71.2 T21.1
N$91: R72.2 T22.1
N$92: R73.2 T23.1
N$93: R74.2 T24.1
N$94: IC7.17 TP7.TP
N$95: IC7.16 TP8.TP
N$96: LED5.A R75.2
N$97: R79.2 X2.1
N$98: R78.2 X2.6
N$99: R77.2 X2.2
N$100: R76.2 X2.7
N$101: IC9.2 U$6.2
N$102: R80.1 R81.2 U$6.3
N$103: Q16.1 R82.2 R85.2
N$104: Q17.1 R83.2 R84.2
N$105: C28.1 IC10.27
N$106: JP4.D+ R87.1
N$107: JP4.D- R86.1
N$108: IC10.30 R86.2
N$109: IC10.29 R87.2
N$110: LED7.A R88.2
N$111: C32.1 IC10.2 Q18.2
N$112: C31.1 IC10.1 Q18.1
N$113: IC10.24 R89.2 TP12.TP
N$114: R82.1 T25.2
N$115: R83.1 T26.2
N$116: R90.2 T25.1
N$117: R91.2 T26.1
N$118: Q19.1 R92.2 R95.2
N$119: Q20.1 R93.2 R94.2
N$120: R92.1 T27.2
N$121: R93.1 T28.2
N$122: R96.2 T27.1
N$123: R97.2 T28.1
N$124: R98.2 T29.1
N$125: R99.2 T30.1
N$126: R100.2 T31.1
N$127: R101.2 T32.1
N$128: IC10.17 TP10.TP
N$129: IC10.16 TP11.TP
N$130: LED8.A R102.2
N$131: R106.2 X3.1
N$132: R105.2 X3.6
N$133: R104.2 X3.2
N$134: R103.2 X3.7
N$135: IC12.2 U$8.2
N$136: R107.1 R108.2 U$8.3
N$137: Q21.1 R109.2 R112.2
N$138: Q22.1 R110.2 R111.2
N$139: C37.1 IC13.27
N$140: JP5.D+ R114.1
N$141: JP5.D- R113.1
N$142: IC13.30 R113.2
N$143: IC13.29 R114.2
N$144: LED9.A R115.2
N$145: C41.1 IC13.2 Q23.2
N$146: C40.1 IC13.1 Q23.1
N$147: IC13.24 R116.2 TP15.TP
N$148: R109.1 T33.2
N$149: R110.1 T34.2
N$150: R117.2 T33.1
N$151: R118.2 T34.1
N$152: Q24.1 R119.2 R122.2
N$153: Q25.1 R120.2 R121.2
N$154: R119.1 T35.2
N$155: R120.1 T36.2
N$156: R123.2 T35.1
N$157: R124.2 T36.1
N$158: R125.2 T37.1
N$159: R126.2 T38.1
N$160: R127.2 T39.1
N$161: R128.2 T40.1
N$162: IC13.17 TP13.TP
N$163: IC13.16 TP14.TP
N$164: LED10.A R129.2
N$165: R133.2 X4.1
N$166: R132.2 X4.6
N$167: R131.2 X4.2
N$168: R130.2 X4.7
N$169: IC15.2 U$10.2
N$170: R134.1 R135.2 U$10.3
N$171: Q26.1 R136.2 R139.2
N$172: Q27.1 R137.2 R138.2
N$173: C46.1 IC16.27
N$174: JP6.D+ R141.1
N$175: JP6.D- R140.1
N$176: IC16.30 R140.2
N$177: IC16.29 R141.2
N$178: LED11.A R142.2
N$179: C50.1 IC16.2 Q28.2
N$180: C49.1 IC16.1 Q28.1
N$181: IC16.24 R143.2 TP18.TP
N$182: R136.1 T41.2
N$183: R137.1 T42.2
N$184: R144.2 T41.1
N$185: R145.2 T42.1
N$186: Q29.1 R146.2 R149.2
N$187: Q30.1 R147.2 R148.2
N$188: R146.1 T43.2
N$189: R147.1 T44.2
N$190: R150.2 T43.1
N$191: R151.2 T44.1
N$192: R152.2 T45.1
N$193: R153.2 T46.1
N$194: R154.2 T47.1
N$195: R155.2 T48.1
N$196: IC16.17 TP16.TP
N$197: IC16.16 TP17.TP
N$198: LED12.A R156.2
N$199: R160.2 X5.1
N$200: R159.2 X5.6
N$201: R158.2 X5.2
N$202: R157.2 X5.7
N$203: IC18.2 U$12.2
N$204: R161.1 R162.2 U$12.3
N$205: Q31.1 R163.2 R166.2
N$206: Q32.1 R164.2 R165.2
N$207: C55.1 IC19.27
N$208: JP7.D+ R168.1
N$209: JP7.D- R167.1
N$210: IC19.30 R167.2
N$211: IC19.29 R168.2
N$212: LED13.A R169.2
N$213: C59.1 IC19.2 Q33.2
N$214: C58.1 IC19.1 Q33.1
N$215: IC19.24 R170.2 TP21.TP
N$216: R163.1 T49.2
N$217: R164.1 T50.2
N$218: R171.2 T49.1
N$219: R172.2 T50.1
N$220: Q34.1 R173.2 R176.2
N$221: Q35.1 R174.2 R175.2
N$222: R173.1 T51.2
N$223: R174.1 T52.2
N$224: R177.2 T51.1
N$225: R178.2 T52.1
N$226: R179.2 T53.1
N$227: R180.2 T54.1
N$228: R181.2 T55.1
N$229: R182.2 T56.1
N$230: IC19.17 TP19.TP
N$231: IC19.16 TP20.TP
N$232: LED14.A R183.2
N$233: R187.2 X7.1
N$234: R186.2 X7.6
N$235: R185.2 X7.2
N$236: R184.2 X7.7
N$237: IC21.2 U$14.2
N$238: R188.1 R189.2 U$14.3
N$239: Q36.1 R190.2 R193.2
N$240: Q37.1 R191.2 R192.2
N$241: C64.1 IC22.27
N$242: JP8.D+ R195.1
N$243: JP8.D- R194.1
N$244: IC22.30 R194.2
N$245: IC22.29 R195.2
N$246: LED15.A R196.2
N$247: C68.1 IC22.2 Q38.2
N$248: C67.1 IC22.1 Q38.1
N$249: IC22.24 R197.2 TP24.TP
N$250: R190.1 T57.2
N$251: R191.1 T58.2
N$252: R198.2 T57.1
N$253: R199.2 T58.1
N$254: Q39.1 R200.2 R203.2
N$255: Q40.1 R201.2 R202.2
N$256: R200.1 T59.2
N$257: R201.1 T60.2
N$258: R204.2 T59.1
N$259: R205.2 T60.1
N$260: R206.2 T61.1
N$261: R207.2 T62.1
N$262: R208.2 T63.1
N$263: R209.2 T64.1
N$264: IC22.17 TP22.TP
N$265: IC22.16 TP23.TP
N$266: LED16.A R210.2
N$267: R214.2 X8.1
N$268: R213.2 X8.6
N$269: R212.2 X8.2
N$270: R211.2 X8.7
N$271: IC24.2 U$16.2
N$272: R215.1 R216.2 U$16.3
O1: R20.1 T3.2
O2: R17.1 T4.2
O3: R16.1 T7.2
O4: R15.1 T8.2
O5: R49.1 T16.2
O6: R50.1 T15.2
O7: R51.1 T14.2
O8: R52.1 T13.2
O9: R76.1 T24.2
O10: R77.1 T23.2
O11: R78.1 T22.2
O12: R79.1 T21.2
O13: R103.1 T32.2
O14: R104.1 T31.2
O15: R105.1 T30.2
O16: R106.1 T29.2
O17: R130.1 T40.2
O18: R131.1 T39.2
O19: R132.1 T38.2
O20: R133.1 T37.2
O21: R157.1 T48.2
O22: R158.1 T47.2
O23: R159.1 T46.2
O24: R160.1 T45.2
O25: R184.1 T56.2
O26: R185.1 T55.2
O27: R186.1 T54.2
O28: R187.1 T53.2
O29: R211.1 T64.2
O30: R212.1 T63.2
O31: R213.1 T62.2
O32: R214.1 T61.2
T1: IC1.12 R22.1
T2: IC1.11 R24.1
T3: IC1.10 R26.1
T4: IC1.9 R28.1
T5: IC1.5
T6: IC4.12 R44.1
T7: IC4.11 R45.1
T8: IC4.10 R46.1
T9: IC4.9 R47.1
T10: IC4.5
T11: IC7.12 R71.1
T12: IC7.11 R72.1
T13: IC7.10 R73.1
T14: IC7.9 R74.1
T15: IC7.5
T16: IC10.12 R98.1
T17: IC10.11 R99.1
T18: IC10.10 R100.1
T19: IC10.9 R101.1
T20: IC10.5
T21: IC13.12 R125.1
T22: IC13.11 R126.1
T23: IC13.10 R127.1
T24: IC13.9 R128.1
T25: IC13.5
T26: IC16.12 R152.1
T27: IC16.11 R153.1
T28: IC16.10 R154.1
T29: IC16.9 R155.1
T30: IC16.5
T31: IC19.12 R179.1
T32: IC19.11 R180.1
T33: IC19.10 R181.1
T34: IC19.9 R182.1
T35: IC19.5
T36: IC22.12 R206.1
T37: IC22.11 R207.1
T38: IC22.10 R208.1
T39: IC22.9 R209.1
T40: IC22.5
TEMP: IC1.15 U$2.1
TEMP1: IC4.15 U$4.1
TEMP2: IC7.15 U$6.1
TEMP3: IC10.15 U$8.1
TEMP4: IC13.15 U$10.1
TEMP5: IC16.15 U$12.1
TEMP6: IC19.15 U$14.1
TEMP7: IC22.15 U$16.1

## Tracks (layer width: path | path; a pad name or v marks a point on that pad's centre or on a via)
5V
  Top 0.254: T7.3 33.04,234.69 31.24,234.69 30.14,233.59 29.04,233.59 28.64,233.19 | T3.3 32.84,230.09 31.24,228.49 28.74,228.49 28.54,228.69 28.54,233.09 28.64,233.19 | T4.3 38.14,228.89 44.54,228.89 45.44,229.79 45.44,239.09 44.44,240.09 44.44,252.19 41.84,254.79 38.24,254.79 37.94,255.09 37.94,261.58 | JP1.VBUS 13.87,256.19 12.14,256.19 11.74,255.79 11.74,253.99 12.44,253.29 13.84,253.29 | 13.84,253.29 23.34,253.29 23.54,253.09 C2.2 | 13.84,253.29 C3.2 15.26,251.87 C6.1 | 30.31,258.02 30.11,258.02 26.44,261.69 22.69,261.69 R8.1 22.54,261.89 C7.1 19.89,261.84 19.09,261.84 18.3,262.63 18.3,265.79 22.08,269.57 48.44,269.57 51.49,266.52 51.49,258.12 52.39,257.22 U$2.8 54.64,257.22 | IC1.4 29.81,251.42 30.54,250.69 39.64,250.69 40.24,250.09 40.24,242.39 39.44,241.59 24.54,241.59 19.99,237.05 X6.9 | 28.64,233.19 | 54.64,257.22 55.33,257.22 56.62,258.51 56.62,261.91 57.72,263 63.09,263 R23.2 | 41.73,264.44 IC2.4 | 54.64,257.22 54.5,257.08 54.5,251.07 IC3.1
  Top 0.305: 26.01,256.01 IC1.31 IC1.32 25.56,255.11 23.54,253.09 | 41.64,259.18 40.37,259.18 38.3,261.25 | 38.3,261.25 37.96,261.6 | 37.96,261.6 33.89,261.6 30.31,258.02 28.94,256.64 28.94,256.01 | 41.64,259.18 42.4,259.95 IC2.4 42.52,263.89 C9.1 | 41.64,259.18 42.4,258.42 IC2.2 | T7.3 T8.3 | T3.3 | T3.3 T4.3 | 38.3,261.25 | 37.94,261.58 arc-90 37.96,261.6 | R7.1 33.14,226.77 T3.3
  Top 0.406: 26.01,256.01 28.94,256.01 29.81,255.14 IC1.4
5V1
  Top 0.254: T15.3 107.09,234.78 105.29,234.78 104.19,233.68 103.09,233.68 102.69,233.28 | T13.3 106.89,230.18 105.29,228.58 102.79,228.58 102.59,228.78 102.59,233.18 102.69,233.28 | T14.3 112.19,228.98 118.59,228.98 119.49,229.88 119.49,239.18 118.49,240.18 118.49,252.28 115.89,254.88 112.29,254.88 111.99,255.18 111.99,261.67 | JP2.VBUS 87.92,256.28 86.19,256.28 85.79,255.88 85.79,254.08 86.49,253.38 87.89,253.38 | 87.89,253.38 97.39,253.38 97.59,253.18 C11.2 | 87.89,253.38 C12.2 89.31,251.96 C15.1 | 104.36,258.11 104.16,258.11 100.49,261.78 96.74,261.78 R35.1 96.59,261.98 C16.1 93.94,261.93 93.14,261.93 92.35,262.72 92.35,265.88 96.13,269.66 122.49,269.66 125.54,266.61 125.54,258.21 126.44,257.31 U$4.8 128.69,257.31 | IC4.4 103.86,251.51 104.59,250.78 113.69,250.78 114.29,250.18 114.29,242.48 113.49,241.68 98.59,241.68 94.04,237.14 X1.9 | 102.69,233.28 | 128.69,257.31 129.37,257.31 130.67,258.6 130.67,262 131.76,263.09 137.14,263.09 R53.2 | 115.78,264.53 IC5.4 | 128.69,257.31 128.55,257.17 128.55,251.16 IC6.1
  Top 0.305: 100.06,256.1 IC4.31 IC4.32 99.61,255.2 97.59,253.18 | 115.69,259.27 114.42,259.27 112.35,261.34 | 112.35,261.34 112,261.69 | 112,261.69 107.94,261.69 104.36,258.11 102.99,256.73 102.99,256.1 | 115.69,259.27 116.45,260.04 IC5.4 116.57,263.98 C18.1 | 115.69,259.27 116.45,258.51 IC5.2 | T15.3 T16.3 | T13.3 | T13.3 T14.3 | 112.35,261.34 | 111.99,261.67 arc-90 112,261.69 | R34.1 107.19,226.85 T13.3
  Top 0.406: 100.06,256.1 102.99,256.1 103.86,255.23 IC4.4
5V2
  Top 0.254: T23.3 33.25,167.02 31.45,167.02 30.35,165.92 29.25,165.92 28.85,165.52 | T21.3 33.05,162.42 31.45,160.82 28.95,160.82 28.75,161.02 28.75,165.42 28.85,165.52 | T22.3 38.35,161.22 44.75,161.22 45.65,162.12 45.65,171.42 44.65,172.42 44.65,184.52 42.05,187.12 38.45,187.12 38.15,187.42 38.15,193.91 | JP3.VBUS 14.08,188.52 12.35,188.52 11.95,188.12 11.95,186.32 12.65,185.62 14.05,185.62 | 14.05,185.62 23.55,185.62 23.75,185.42 C20.2 | 14.05,185.62 C21.2 15.47,184.2 C24.1 | 30.52,190.35 30.32,190.35 26.65,194.02 22.9,194.02 R62.1 22.75,194.22 C25.1 20.1,194.17 19.3,194.17 18.51,194.96 18.51,198.12 22.29,201.9 48.65,201.9 51.7,198.85 51.7,190.44 52.6,189.55 U$6.8 54.85,189.55 | IC7.4 30.02,183.75 30.75,183.02 39.85,183.02 40.45,182.42 40.45,174.72 39.65,173.92 24.75,173.92 20.2,169.37 X2.9 | 28.85,165.52 | 54.85,189.55 55.54,189.55 56.83,190.84 56.83,194.23 57.93,195.33 63.3,195.33 R80.2 | 41.94,196.77 IC8.4 | 54.85,189.55 54.71,189.41 54.71,183.39 IC9.1
  Top 0.305: 26.22,188.34 IC7.31 IC7.32 25.77,187.44 23.75,185.42 | 41.85,191.51 40.58,191.51 38.51,193.58 | 38.51,193.58 38.17,193.92 | 38.17,193.92 34.1,193.92 30.52,190.35 29.15,188.97 29.15,188.34 | 41.85,191.51 42.61,192.27 IC8.4 42.73,196.22 C27.1 | 41.85,191.51 42.61,190.75 IC8.2 | T23.3 T24.3 | T21.3 | T21.3 T22.3 | 38.51,193.58 | 38.15,193.91 arc-90 38.17,193.92 | R61.1 33.35,159.09 T21.3
  Top 0.406: 26.22,188.34 29.15,188.34 30.02,187.47 IC7.4
5V3
  Top 0.254: T31.3 107.3,167.11 105.5,167.11 104.4,166.01 103.3,166.01 102.9,165.61 | T29.3 107.1,162.51 105.5,160.91 103,160.91 102.8,161.11 102.8,165.51 102.9,165.61 | T30.3 112.4,161.31 118.8,161.31 119.7,162.21 119.7,171.51 118.7,172.51 118.7,184.61 116.1,187.21 112.5,187.21 112.2,187.51 112.2,194 | JP4.VBUS 88.13,188.61 86.4,188.61 86,188.21 86,186.41 86.7,185.71 88.1,185.71 | 88.1,185.71 97.6,185.71 97.8,185.51 C29.2 | 88.1,185.71 C30.2 89.52,184.29 C33.1 | 104.57,190.44 104.37,190.44 100.7,194.11 96.95,194.11 R89.1 96.8,194.31 C34.1 94.15,194.26 93.35,194.26 92.56,195.05 92.56,198.21 96.34,201.99 122.7,201.99 125.75,198.94 125.75,190.53 126.65,189.64 U$8.8 128.9,189.64 | IC10.4 104.07,183.84 104.8,183.11 113.9,183.11 114.5,182.51 114.5,174.81 113.7,174.01 98.8,174.01 94.25,169.46 X3.9 | 102.9,165.61 | 128.9,189.64 129.58,189.64 130.88,190.93 130.88,194.32 131.97,195.42 137.35,195.42 R107.2 | 115.98,196.86 IC11.4 | 128.9,189.64 128.76,189.5 128.76,183.48 IC12.1
  Top 0.305: 100.27,188.43 IC10.31 IC10.32 99.82,187.53 97.8,185.51 | 115.9,191.6 114.63,191.6 112.56,193.67 | 112.56,193.67 112.21,194.01 | 112.21,194.01 108.15,194.01 104.57,190.44 103.2,189.06 103.2,188.43 | 115.9,191.6 116.66,192.36 IC11.4 116.78,196.31 C36.1 | 115.9,191.6 116.66,190.84 IC11.2 | T31.3 T32.3 | T29.3 | T29.3 T30.3 | 112.56,193.67 | 112.2,194 arc-90 112.21,194.01 | R88.1 107.4,159.18 T29.3
  Top 0.406: 100.27,188.43 103.2,188.43 104.07,187.56 IC10.4
5V4
  Top 0.254: T39.3 33.25,95.63 31.45,95.63 30.35,94.53 29.25,94.53 28.85,94.13 | T37.3 33.05,91.03 31.45,89.43 28.95,89.43 28.75,89.63 28.75,94.03 28.85,94.13 | T38.3 38.35,89.83 44.75,89.83 45.65,90.73 45.65,100.03 44.65,101.03 44.65,113.13 42.05,115.73 38.45,115.73 38.15,116.03 38.15,122.52 | JP5.VBUS 14.08,117.13 12.35,117.13 11.95,116.73 11.95,114.93 12.65,114.23 14.05,114.23 | 14.05,114.23 23.55,114.23 23.75,114.03 C38.2 | 14.05,114.23 C39.2 15.47,112.81 C42.1 | 30.53,118.96 30.33,118.96 26.65,122.63 22.9,122.63 R116.1 22.75,122.83 C43.1 20.1,122.78 19.3,122.78 18.51,123.57 18.51,126.73 22.29,130.51 48.65,130.51 51.7,127.46 51.7,119.06 52.6,118.16 U$10.8 54.85,118.16 | IC13.4 30.02,112.36 30.75,111.63 39.85,111.63 40.45,111.03 40.45,103.33 39.65,102.53 24.75,102.53 20.2,97.99 X4.9 | 28.85,94.13 | 54.85,118.16 55.54,118.16 56.83,119.45 56.83,122.85 57.93,123.94 63.31,123.94 R134.2 | 41.94,125.38 IC14.4 | 54.85,118.16 54.71,118.02 54.71,112.01 IC15.1
  Top 0.305: 26.22,116.95 IC13.31 IC13.32 25.77,116.05 23.75,114.03 | 41.85,120.12 40.58,120.12 38.51,122.19 | 38.51,122.19 38.17,122.54 | 38.17,122.54 34.11,122.54 30.53,118.96 29.15,117.58 29.15,116.95 | 41.85,120.12 42.61,120.88 IC14.4 42.74,124.83 C45.1 | 41.85,120.12 42.61,119.36 IC14.2 | T39.3 T40.3 | T37.3 | T37.3 T38.3 | 38.51,122.19 | 38.15,122.52 arc-90 38.17,122.54 | R115.1 33.35,87.7 T37.3
  Top 0.406: 26.22,116.95 29.15,116.95 30.02,116.08 IC13.4
5V5
  Top 0.254: T47.3 107.3,95.72 105.5,95.72 104.4,94.62 103.3,94.62 102.9,94.22 | T45.3 107.1,91.12 105.5,89.52 103,89.52 102.8,89.72 102.8,94.12 102.9,94.22 | T46.3 112.4,89.92 118.8,89.92 119.7,90.82 119.7,100.12 118.7,101.12 118.7,113.22 116.1,115.82 112.5,115.82 112.2,116.12 112.2,122.61 | JP6.VBUS 88.13,117.22 86.4,117.22 86,116.82 86,115.02 86.7,114.32 88.1,114.32 | 88.1,114.32 97.6,114.32 97.8,114.12 C47.2 | 88.1,114.32 C48.2 89.52,112.9 C51.1 | 104.57,119.05 104.37,119.05 100.7,122.72 96.95,122.72 R143.1 96.8,122.92 C52.1 94.15,122.87 93.35,122.87 92.56,123.66 92.56,126.82 96.34,130.6 122.7,130.6 125.75,127.55 125.75,119.14 126.65,118.25 U$12.8 128.9,118.25 | IC16.4 104.07,112.45 104.8,111.72 113.9,111.72 114.5,111.12 114.5,103.42 113.7,102.62 98.8,102.62 94.25,98.08 X5.9 | 102.9,94.22 | 128.9,118.25 129.58,118.25 130.88,119.54 130.88,122.93 131.97,124.03 137.35,124.03 R161.2 | 115.99,125.47 IC17.4 | 128.9,118.25 128.76,118.11 128.76,112.1 IC18.1
  Top 0.305: 100.27,117.04 IC16.31 IC16.32 99.82,116.14 97.8,114.12 | 115.9,120.21 114.63,120.21 112.56,122.28 | 112.56,122.28 112.21,122.63 | 112.21,122.63 108.15,122.63 104.57,119.05 103.2,117.67 103.2,117.04 | 115.9,120.21 116.66,120.97 IC17.4 116.78,124.92 C54.1 | 115.9,120.21 116.66,119.45 IC17.2 | T47.3 T48.3 | T45.3 | T45.3 T46.3 | 112.56,122.28 | 112.2,122.61 arc-90 112.21,122.63 | R142.1 107.4,87.79 T45.3
  Top 0.406: 100.27,117.04 103.2,117.04 104.07,116.17 IC16.4
5V6
  Top 0.254: T55.3 33.46,27.96 31.66,27.96 30.56,26.86 29.46,26.86 29.06,26.46 | T53.3 33.26,23.36 31.66,21.76 29.16,21.76 28.96,21.96 28.96,26.36 29.06,26.46 | T54.3 38.56,22.16 44.96,22.16 45.86,23.06 45.86,32.36 44.86,33.36 44.86,45.46 42.26,48.06 38.66,48.06 38.36,48.36 38.36,54.85 | JP7.VBUS 14.29,49.46 12.56,49.46 12.16,49.06 12.16,47.26 12.86,46.56 14.26,46.56 | 14.26,46.56 23.76,46.56 23.96,46.36 C56.2 | 14.26,46.56 C57.2 15.68,45.14 C60.1 | 30.74,51.29 30.54,51.29 26.86,54.96 23.11,54.96 R170.1 22.96,55.16 C61.1 20.31,55.11 19.52,55.11 18.72,55.9 18.72,59.06 22.5,62.84 48.86,62.84 51.91,59.79 51.91,51.38 52.81,50.48 U$14.8 55.06,50.48 | IC19.4 30.23,44.69 30.96,43.96 40.06,43.96 40.66,43.36 40.66,35.66 39.86,34.86 24.96,34.86 20.41,30.31 X7.9 | 29.06,26.46 | 55.06,50.48 55.75,50.48 57.04,51.78 57.04,55.17 58.14,56.27 63.52,56.27 R188.2 | 42.15,57.71 IC20.4 | 55.06,50.48 54.92,50.35 54.92,44.33 IC21.1
  Top 0.305: 26.43,49.28 IC19.31 IC19.32 25.98,48.38 23.96,46.36 | 42.06,52.45 40.79,52.45 38.72,54.52 | 38.72,54.52 38.38,54.86 | 38.38,54.86 34.31,54.86 30.74,51.29 29.36,49.91 29.36,49.28 | 42.06,52.45 42.82,53.21 IC20.4 42.95,57.16 C63.1 | 42.06,52.45 42.82,51.69 IC20.2 | T55.3 T56.3 | T53.3 | T53.3 T54.3 | 38.72,54.52 | 38.36,54.85 arc-90 38.38,54.86 | R169.1 33.56,20.03 T53.3
  Top 0.406: 26.43,49.28 29.36,49.28 30.23,48.41 IC19.4
5V7
  Top 0.254: T63.3 107.51,28.05 105.71,28.05 104.61,26.95 103.51,26.95 103.11,26.55 | T61.3 107.31,23.45 105.71,21.85 103.21,21.85 103.01,22.05 103.01,26.45 103.11,26.55 | T62.3 112.61,22.25 119.01,22.25 119.91,23.15 119.91,32.45 118.91,33.45 118.91,45.55 116.31,48.15 112.71,48.15 112.41,48.45 112.41,54.94 | JP8.VBUS 88.34,49.55 86.61,49.55 86.21,49.15 86.21,47.35 86.91,46.65 88.31,46.65 | 88.31,46.65 97.81,46.65 98.01,46.45 C65.2 | 88.31,46.65 C66.2 89.73,45.23 C69.1 | 104.78,51.37 104.58,51.37 100.91,55.05 97.16,55.05 R197.1 97.01,55.25 C70.1 94.36,55.2 93.56,55.2 92.77,55.99 92.77,59.15 96.55,62.93 122.91,62.93 125.96,59.88 125.96,51.47 126.86,50.57 U$16.8 129.11,50.57 | IC22.4 104.28,44.78 105.01,44.05 114.11,44.05 114.71,43.45 114.71,35.75 113.91,34.95 99.01,34.95 94.46,30.4 X8.9 | 103.11,26.55 | 129.11,50.57 129.79,50.57 131.09,51.87 131.09,55.26 132.19,56.36 137.56,56.36 R215.2 | 116.2,57.8 IC23.4 | 129.11,50.57 128.97,50.44 128.97,44.42 IC24.1
  Top 0.305: 100.48,49.36 IC22.31 IC22.32 100.03,48.47 98.01,46.45 | 116.11,52.54 114.84,52.54 112.77,54.61 | 112.77,54.61 112.42,54.95 | 112.42,54.95 108.36,54.95 104.78,51.37 103.41,50 103.41,49.36 | 116.11,52.54 116.87,53.3 IC23.4 116.99,57.25 C72.1 | 116.11,52.54 116.87,51.78 IC23.2 | T63.3 T64.3 | T61.3 | T61.3 T62.3 | 112.77,54.61 | 112.41,54.94 arc-90 112.42,54.95 | R196.1 107.61,20.12 T61.3
  Top 0.406: 100.48,49.36 103.41,49.36 104.28,48.49 IC22.4
12V  (via drill 0.6)
  Top 0.254: 46.71,251.4 46.71,252.45 | R21.1 52.55,222.45 | 52.55,222.45 52.55,223.88 | 52.55,222.45 52.55,215.33 53.13,214.75 v57.73,214.75 v57.73,214.74
  Top 0.305: IC2.3 46.71,255.58 46.71,252.45 46.71,240.67 48.03,239.35 48.03,225.22 48.74,224.51 49.96,224.51 v50.04,224.59 50.75,223.88 52.55,223.88
  Top 0.406: 44.71,256.67 IC2.3 47.19,257.57 C8.1
  Bottom 0.254: T2.3 25.78,238.13 26.46,238.8 | T1.3 32.65,266.79 33.96,268.1 43.31,268.1 | T6.3 49.1,238.78 49.1,229.77 49.55,229.31 49.55,225.3 50.04,224.82 v50.04,224.59 | v57.73,214.74 57.73,218.95 U$1.5
  Bottom 0.305: T5.3 45.03,266.37 43.31,268.1 23.24,268.1 20.17,265.03 20.17,240.41 T2.3 | T6.3 48.52,239.4 27.05,239.4 26.46,238.8
  Bottom 3.81: U$1.1 U$1.2 U$1.3 U$1.4 U$1.5
12V1  (via drill 0.6)
  Top 0.254: 120.76,251.49 120.76,252.54 | R48.1 126.6,222.54 | 126.6,222.54 126.6,223.97 | 126.6,222.54 126.6,215.42 127.18,214.84 v131.78,214.84 v131.78,214.83
  Top 0.305: IC5.3 120.76,255.67 120.76,252.54 120.76,240.76 122.08,239.44 122.08,225.31 122.79,224.6 124.01,224.6 v124.08,224.68 124.8,223.97 126.6,223.97
  Top 0.406: 118.76,256.76 IC5.3 121.24,257.66 C17.1
  Bottom 0.254: T12.3 99.83,238.22 100.5,238.89 | T11.3 106.7,266.88 108.01,268.19 117.35,268.19 | T10.3 123.14,238.87 123.14,229.86 123.6,229.4 123.6,225.39 124.08,224.91 v124.08,224.68 | v131.78,214.83 131.78,219.04 U$3.5
  Bottom 0.305: T9.3 119.08,266.46 117.35,268.19 97.29,268.19 94.21,265.12 94.21,240.5 T12.3 | T10.3 122.57,239.49 101.1,239.49 100.5,238.89
  Bottom 3.81: U$3.1 U$3.2 U$3.3 U$3.4 U$3.5
12V2  (via drill 0.6)
  Top 0.254: 46.92,183.72 46.92,184.78 | R75.1 52.76,154.78 | 52.76,154.78 52.76,156.21 | 52.76,154.78 52.76,147.65 53.34,147.07 v57.94,147.07 v57.95,147.07
  Top 0.305: IC8.3 46.92,187.9 46.92,184.78 46.92,173 48.24,171.67 48.24,157.55 48.95,156.84 50.17,156.84 v50.25,156.92 50.96,156.21 52.76,156.21
  Top 0.406: 44.92,189 IC8.3 47.4,189.9 C26.1
  Bottom 0.254: T20.3 25.99,170.46 26.67,171.13 | T19.3 32.86,199.12 34.17,200.43 43.52,200.43 | T18.3 49.31,171.11 49.31,162.1 49.77,161.64 49.77,157.63 50.25,157.15 v50.25,156.92 | v57.95,147.07 57.95,151.28 U$5.5
  Bottom 0.305: T17.3 45.24,198.7 43.52,200.43 23.45,200.43 20.38,197.35 20.38,172.73 T20.3 | T18.3 48.73,171.73 27.26,171.73 26.67,171.13
  Bottom 3.81: U$5.1 U$5.2 U$5.3 U$5.4 U$5.5
12V3  (via drill 0.6)
  Top 0.254: 120.97,183.81 120.97,184.87 | R102.1 126.81,154.87 | 126.81,154.87 126.81,156.3 | 126.81,154.87 126.81,147.74 127.39,147.16 v131.99,147.16
  Top 0.305: IC11.3 120.97,187.99 120.97,184.87 120.97,173.09 122.29,171.76 122.29,157.64 123,156.93 124.22,156.93 v124.29,157.01 125.01,156.3 126.81,156.3
  Top 0.406: 118.97,189.09 IC11.3 121.45,189.99 C35.1
  Bottom 0.254: T28.3 100.04,170.55 100.71,171.22 | T27.3 106.91,199.21 108.22,200.52 117.56,200.52 | T26.3 123.35,171.2 123.35,162.19 123.81,161.73 123.81,157.72 124.29,157.24 v124.29,157.01 | v131.99,147.16 131.99,151.37 U$7.5
  Bottom 0.305: T25.3 119.29,198.79 117.56,200.52 97.5,200.52 94.42,197.44 94.42,172.82 T28.3 | T26.3 122.78,171.82 101.31,171.82 100.71,171.22
  Bottom 3.81: U$7.1 U$7.2 U$7.3 U$7.4 U$7.5
12V4  (via drill 0.6)
  Top 0.254: 46.92,112.34 46.92,113.39 | R129.1 52.76,83.39 | 52.76,83.39 52.76,84.82 | 52.76,83.39 52.76,76.27 53.34,75.69 v57.94,75.69 v57.95,75.68